# Altium PCB BUZT13-01CN-E-201-20140930.PcbDoc (part 1 of 2)
Units mm, origin at the board's own origin, x right, y up, seen from the top; angles counter-clockwise.
Board outline 64.01 x 46.1 mm, 2 copper layers (Top Layer, Bottom Layer); 112 components, 79 nets, 311 pads, 291 vias.
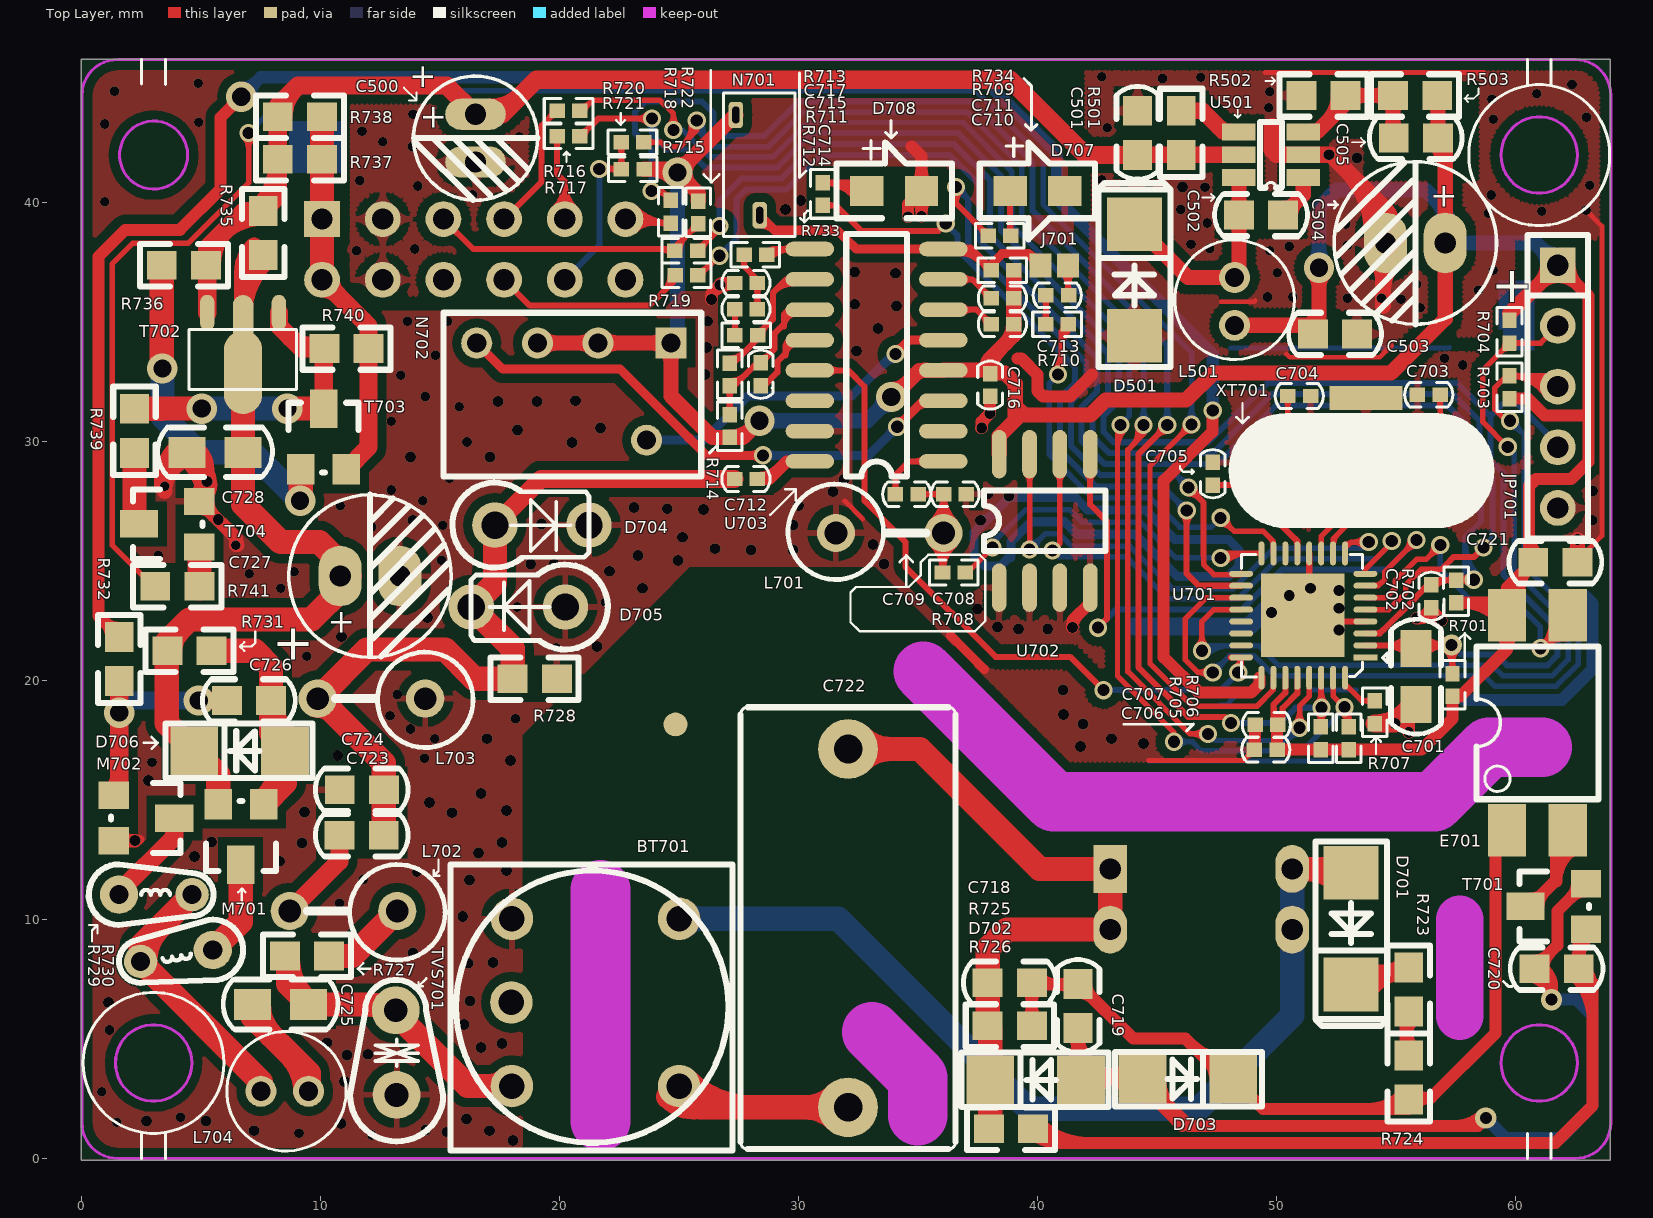
[diagram p0: Top Layer view]
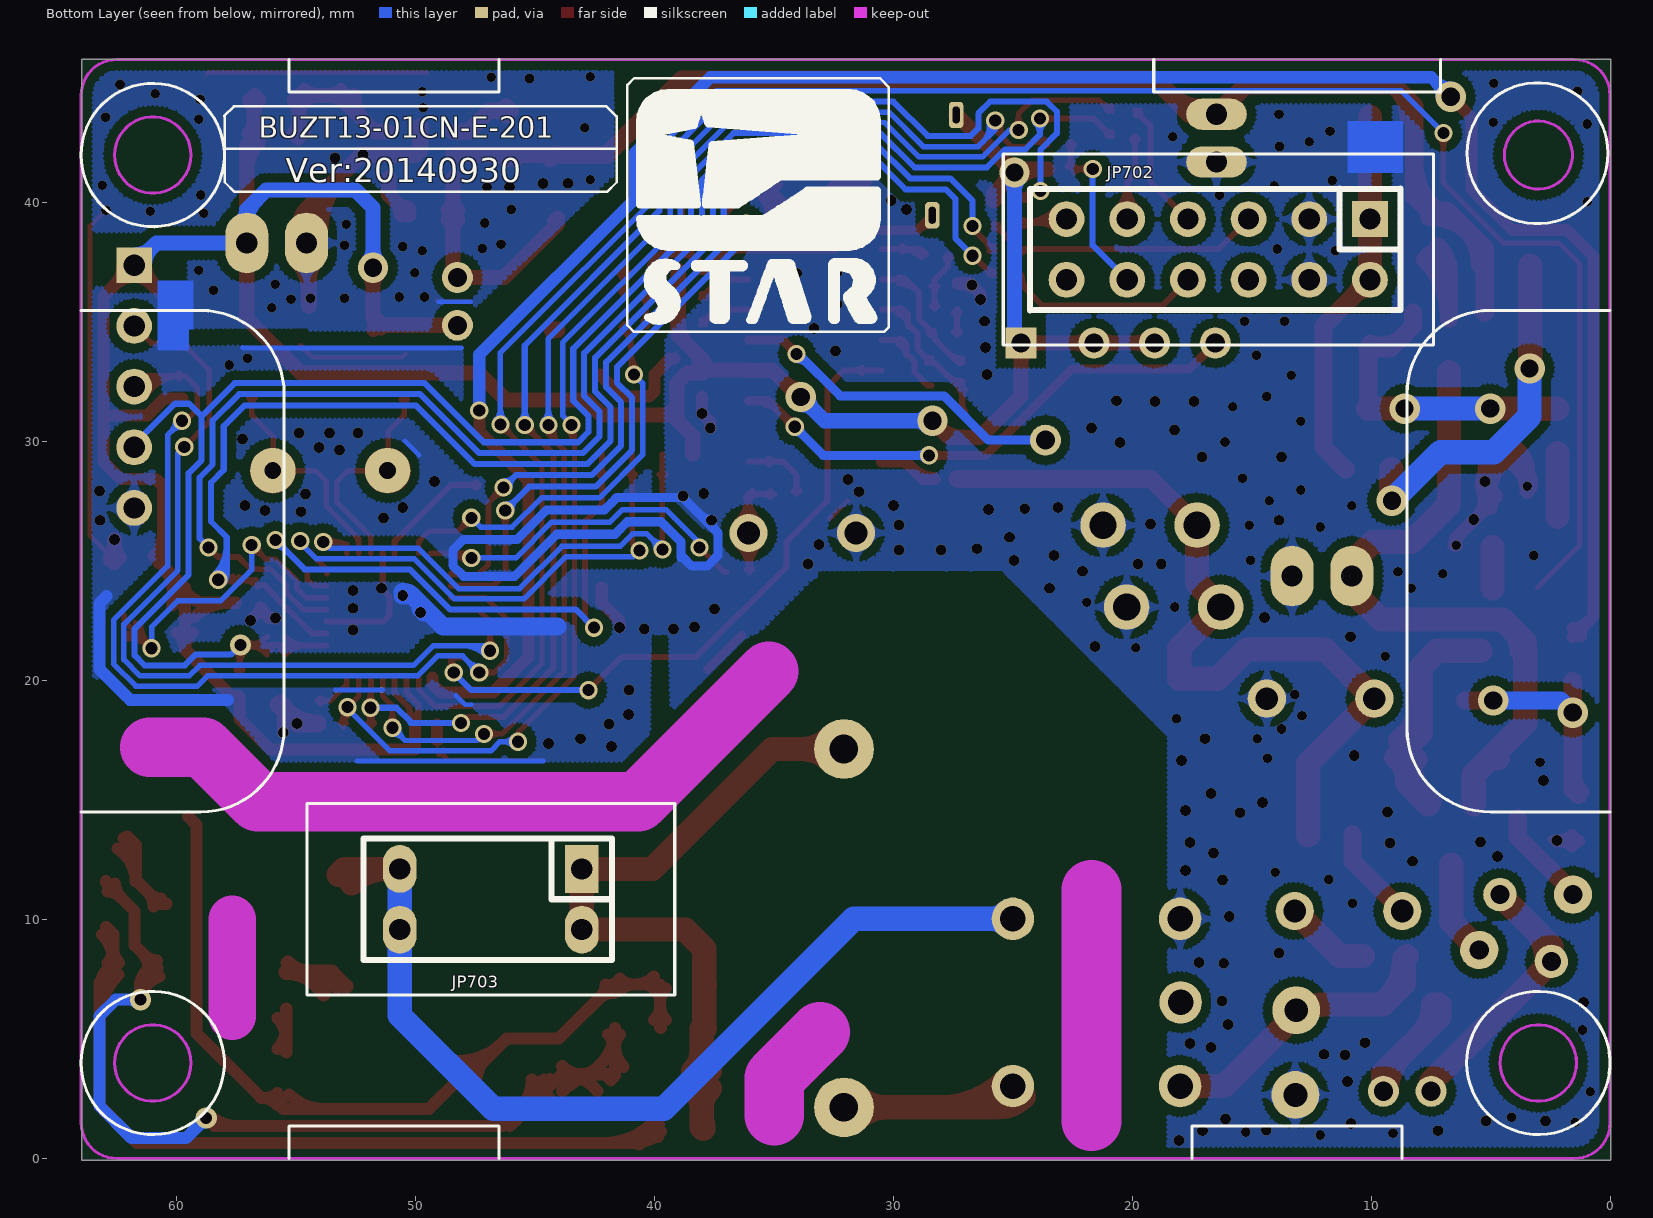
[diagram p1: Bottom Layer view, seen from below]

## Layer stack, top to bottom
Top Layer: signal copper 0.0356
Dielectric: dielectric 0.32, FR-4, Dk 4.8
Bottom Layer: signal copper 0.0356

## Board outline
-0.036,46.019 -0.036,-0.082 63.972,-0.082 63.972,4.617 63.972,46.019 -0.036,46.019

## Design rules (kind name [scope] priority, off if disabled: settings)
Clearance Clearance_2 [Inpoly] p1: gap=0.381
Clearance [All] p2: gap=0.203
Clearance JumpClearance [All vs (InComponent('J701'))] p3: gap=0.152
Clearance ArmClearance_1 [All vs (InComponent('U304'))] p4: gap=0.203
ComponentClearance [All] p1 off: gap=0.254 collisioncheckmode=3 verticalgap=0.254 showdistances=FALSE
DiffPairsRouting [All] p1: maxlimit=0.254 minlimit=0.152 mostfreqgap=0.254 maxuncoupledlength=12.7
HoleToHoleClearance [All] p1: gap=0 allowstackedmicrovias=TRUE
MinimumSolderMaskSliver [All] p1: minsoldermaskwidth=0
PolygonConnect ViaPolygonConnect [isVia] p1: connectstyle=Direct reliefconductorwidth=0.254 reliefentries=4 polygonreliefangle="90 Angle"
PolygonConnect [All] p2: connectstyle=Relief reliefconductorwidth=0.254 reliefentries=4 polygonreliefangle="90 Angle"
RoutingVias [All] p1: holewidth=0.406 width=0.406 viastyle="Through Hole" minholewidth=0.406 minwidth=0.406 maxholewidth=0.762 maxwidth=1.27
SilkToSilkClearance [All] p1: silktosilkclearance=0
SilkscreenOverComponentPads [All] p1: minsilkscreentomaskgap=0
SolderMaskExpansion [All] p1: expansion=0.102
TestPointUsage [All] p1: valid=0 allowmultiple=FALSE
Testpoint [All] p1: side=3 testpointundercomponent=TRUE minsize=1.016 maxsize=2.54 preferedsize=1.524 minholesize=0.508 maxholesize=1.016 preferedholesize=0.813 testpointgrid=0.025 style=297 order=0123456789
Width [All] p1: maxlimit=2.54 minlimit=0.102 preferedwidth=0.254
18 further rules are at their usual default settings.

## Components (designator, comment, footprint, x,y, rotation, side; value= is the part's Value field where it differs from the comment)
BT701 "A80806016(R)" OHXQ_1 25.008,3.042 r90 top
C500 "RD47uF/35V" CAP_ELE_5.0_2.0 16.474,43.707 r90 top
C501 "0603YB105K" CAP_SMD_0603 44.185,42.005 r90 top
C502 "06035G104Z" CAP_SMD_0603 50.281,39.491 r180 top
C503 "0603YB105K" CAP_SMD_0603 51.526,34.512 r0 top
C504 "WL 47uF/50V" CAP_ELE_6.3_2.5 57.063,38.322 r0 top
C505 "06035C470J" CAP_SMD_0603 56.758,42.717 r180 top
C701 "08053B106K" CAP_SMD_0805 55.844,18.993 r90 top
C702 "04025C150K" CAP_SMD_0402 56.479,23.057 r90 top
C703 "04025A200J" CAP_SMD_0402 55.897,31.97 r0 top
C704 "04025A200J" CAP_SMD_0402 51.427,31.914 r180 top
C705 "0402YB105K" CAP_SMD_0402 47.335,28.188 r90 top
C706 "04025G104Z" CAP_SMD_0402 50.027,17.113 r180 top
C707 "04025G104Z" CAP_SMD_0402 50.053,18.155 r180 top
C708 "04025C223K" CAP_SMD_0402 37.023,27.807 r180 top
C709 "04025C103K" CAP_SMD_0402 34.051,27.807 r0 top
C710 "04025G104Z" CAP_SMD_0402 39.004,34.919 r180 top
C711 "04025G104Z" CAP_SMD_0402 39.004,36.011 r180 top
C712 "04025A103K" CAP_SMD_0402 27.32,28.442 r0 top
C713 "04025A103K" CAP_SMD_0402 40.35,36.138 r0 top
C714 "04025G104Z" CAP_SMD_0402 28.412,32.353 r90 top
C715 "04025G104Z" CAP_SMD_0402 27.32,35.554 r0 top
C716 "04025G104Z" CAP_SMD_0402 38.013,31.896 r90 top
C717 "04025C332K" CAP_SMD_0402 28.27,36.646 r180 top
C718 "06035C561K" CAP_SMD_0603 37.912,7.36 r0 top
C719 "06035G224Z" CAP_SMD_0603 41.696,5.455 r90 top
C720 "06035C561K" CAP_SMD_0603 62.651,7.944 r180 top
C721 "06035G104Z" CAP_SMD_0603 60.746,24.962 r0 top
C722 "B32922C3154K189" CAP_PFC_15_18_8.5 32.07,17.139 r270 top
C723 "06035C331J" CAP_SMD_0603 10.784,13.532 r0 top
C724 "06035C332K" CAP_SMD_0603 12.639,15.437 r180 top
C725 "08055C223K" CAP_SMD_0805 9.489,6.445 r180 top
C726 "06035C333K" CAP_SMD_0603 7.914,19.171 r180 top
C727 "RD47uF/50V" CAP_ELE_6.3_2.5 10.81,24.378 r180 top
C728 "08055G105Z" CAP_SMD_0805 6.746,29.559 r180 top
D501 "SM140A" DO-214AC 44.058,34.385 r90 top
D701 "M7(DO-214AC)" DO-214AC 53.126,12.008 r270 top
D702 "LL4148" LL-34 41.823,3.296 r180 top
D703 "ZMM5V1" LL-34 44.389,3.321 r0 top
D704 "1N4679" DIODE-I 17.287,26.511 r0 top
D705 "1N4679" DIODE-I 20.233,23.082 r180 top
D706 "LL4148" LL-34 8.498,17.063 r180 top
D707 "TY-0805URC" LED_0805 38.851,40.5 r0 top locked
D708 "SB-172UYG-CT" LED_0805 32.857,40.5 r0 top locked
E701 "EL2501SK-G" OPT_SOP 59.654,13.735 r90 top
J701 "CA_PAD" CA_PAD 41.279,37.379 r180 top
JP701 "" CON_S_5 61.762,37.408 r270 top
JP702 "*" CON_D_12 10.05,39.32 r0 bottom locked
JP703 "*" CON_D_8 43.04,12.12 r0 bottom
L501 "A61130052" IND_PLU_2_5 48.249,36.875 r270 top
L701 "CECL907311" L4.0-4.5 31.562,26.181 r0 top
L702 "CECL907309" L4.0-4.5 13.197,10.357 r180 top
L703 "CECL907310" L4.0-4.5 14.366,19.247 r180 top
L704 "A61130052" IND_PLU_2_5 9.489,2.813 r180 top
M701 "WPM3407-3/TR" SOT-23-3 7.609,14.827 r180 top
M702 "WNM2306B－3/TR" SOT-23-3 1.336,15.208 r270 top
N701 "JTBM455C28" JTBM455C28 27.371,43.682 r270 top locked
N702 "LT455BW" LT4551 24.653,34.131 r270 top
R501 "0603CR104J" RES_SMD_0603 46.014,42.005 r90 top
R502 "0603CR912J" RES_SMD_0603 51.043,44.495 r0 top
R503 "0603CR473J" RES_SMD_0603 54.879,44.495 r0 top
R701 "0402CR103J" RES_SMD_0402 57.368,19.349 r90 top
R702 "0402CR103J" RES_SMD_0402 57.52,23.26 r90 top
R703 "0402CR103J" RES_SMD_0402 59.756,32.76 r270 top
R704 "0402CR103J" RES_SMD_0402 59.756,34.131 r90 top
R705 "0402CR103J" RES_SMD_0402 51.856,17.113 r90 top
R706 "0402CR103J" RES_SMD_0402 53.025,17.113 r90 top
R707 "0402CR103J" RES_SMD_0402 54.117,18.206 r90 top
R708 "0402CR153J" RES_SMD_0402 36.972,24.53 r180 top
R709 "0402CR222J" RES_SMD_0402 39.004,37.179 r180 top
R710 "0402CR222J" RES_SMD_0402 41.29,34.919 r180 top
R711 "0402CR222J" RES_SMD_0402 28.285,34.462 r180 top
R712 "0402CR105J" RES_SMD_0402 27.117,33.293 r270 top
R713 "0402CR103J" RES_SMD_0402 27.716,37.829 r0 top
R714 "0402CR103J" RES_SMD_0402 27.117,31.134 r270 top
R715 "0402CR101J" RES_SMD_0402 25.77,37.992 r180 top
R716 "0402CR101J" RES_SMD_0402 20.843,43.86 r180 top
R717 "0402CR101J" RES_SMD_0402 20.843,42.793 r180 top
R718 "0402CR101J" RES_SMD_0402 24.653,40.1 r270 top
R719 "0402CR101J" RES_SMD_0402 24.831,36.976 r0 top
R720 "0402CR101J" RES_SMD_0402 22.57,42.539 r0 top
R721 "0402CR103J" RES_SMD_0402 22.577,41.404 r0 top
R722 "0402CR103J" RES_SMD_0402 25.796,40.075 r270 top
R723 "0603CR514J" RES_SMD_0603 55.539,7.995 r270 top
R724 "0603CR514J" RES_SMD_0603 55.539,4.312 r270 top
R725 "0603CR474J" RES_SMD_0603 37.912,5.556 r0 top
R726 "0603CR473J" RES_SMD_0603 37.962,1.238 r0 top
R727 "0603CR621J" RES_SMD_0603 8.498,8.477 r0 top
R728 "0603CR222J" RES_SMD_0603 19.878,20.085 r180 top
R729 "MOF1W±5% 12Ω PT" LCEC-101L 4.612,11.043 r0 top
R730 "MOF1W±5% 12Ω PT" LCEC-101L 2.453,8.249 r189 top
R731 "0603CR222J" RES_SMD_0603 5.425,21.254 r180 top
R732 "0603CR51R0F" RES_SMD_0603 1.564,19.984 r90 top
R733 "0402CR222J" RES_SMD_0402 31.003,39.897 r90 top
R734 "0402CR222J" RES_SMD_0402 37.937,38.627 r0 top
R735 "0603CR103J" RES_SMD_0603 7.584,37.814 r90 top
R736 "0603CR510J" RES_SMD_0603 3.342,37.383 r0 top
R737 "0603CR100J" RES_SMD_0603 8.194,41.828 r0 top
R738 "0603CR100J" RES_SMD_0603 8.194,43.606 r0 top
R739 "0603CR512J" RES_SMD_0603 2.199,29.534 r90 top
R740 "0603CR102J" RES_SMD_0603 10.149,33.903 r0 top
R741 "0603CR103J" RES_SMD_0603 4.917,23.946 r180 top
T701 "2SC2412KT146R" SOT-23_BCE 62.956,9.595 r90 top
T702 "2SAR293PT100" SOT-428 8.244,35.401 r180 top
T703 "2SA1037AKT146R" SOT-23_BCE 9.159,28.848 r0 top
T704 "2SC2412KT146R" SOT-23_BCE 4.917,25.597 r90 top
TVS701 "P6KE22CA" TVS0.14L 13.172,2.661 r90 top
U501 "MP2451DT-LF-Z" "SOT-23 - 6L" 51.12,41.066 r90 top
U701 "M058ZDN" QFN-33 51.122,22.724 r180 top
U702 "CAT24C02WI-GT3" SO-8 38.394,23.895 r90 top
U703 "MC3361BPL" SOP-16 36.057,29.178 r180 top
XT701 "11.0592MHz" XTAL_PLU_HC-49US 51.173,28.795 r0 top

## Footprints (in the part's own frame and the unit in brackets; to place one, negate y for a bottom-side part, rotate by r counter-clockwise, add the part's x,y. Pads: shape width x height; smd on the part's side, far side on the other; paste and mask are expansions set on the pad)
CA_PAD [mil]
  rect 36x40 smd: 1(0.43,0.14) 2(45.43,0.14)
CAP_ELE_5.0_2.0 [mm]
  oval 1.3x2.54 hole 0.889: 1(0.002,-0.001) 2(-1.998,-0.001)
  silkscreen extent -3.6,-2.6 1.6,2.6
CAP_ELE_6.3_2.5 [mm]
  oval 1.8x2.54 hole 0.889: 1(0,0) 2(-2.5,0)
  silkscreen extent -4.65,-3.41 2.15,3.4
CAP_PFC_15_18_8.5 [mm]
  round 2.5 hole 1.2: 1(0,0) 2(15,0)
  silkscreen extent -1.75,-4.5 16.75,4.5
CAP_SMD_0402 [mm] "0402C"
  rect 0.65x0.6 smd: 1(0,0) 2(0.95,0)
  silkscreen extent -0.53,-0.52 1.48,0.52
CAP_SMD_0603 [mm]
  rect 1.25x1.2 smd: 1(0,0) 2(1.85,0)
  silkscreen extent -1.01,-0.89 2.87,0.89
CAP_SMD_0805 [mm]
  rect 1.55x1.3 smd: 1(0,0) 2(2.35,0)
  silkscreen extent -1.23,-1.05 3.58,1.04
CON_D_8 [mm]
  rect 1.4x2 hole 0.889: 1(0,0)
  oval 1.4x2 hole 0.889: 2(0,2.54) 7(7.62,0) 8(7.62,2.54)
  silkscreen extent -1.27,-1.27 9.14,3.81
CON_D_12 [mm]
  rect 1.5x1.5 hole 0.889: 1(0,0)
  round 1.5 hole 0.889: 2(0,2.54) 3(2.54,0) 4(2.54,2.54) 5(5.08,0) 6(5.08,2.54) 7(7.62,0) 8(7.62,2.54) 9(10.16,0) 10(10.16,2.54) 11(12.7,0) 12(12.7,2.54)
  silkscreen extent -1.27,-1.27 14.22,3.81
CON_S_5 [mm]
  rect 1.5x1.5 hole 0.889: 1(0.019,0.016)
  round 1.5 hole 0.889: 2(2.559,0.016) 3(5.099,0.016) 4(7.639,0.016) 5(10.179,0.016)
  silkscreen extent -1.25,-1.25 11.45,1.29
DIODE-I [mil]
  round 75 hole 45: A(0,0) K(155,0)
  silkscreen extent -70,-70 155,70
DO-214AC [mm]
  rect 2.25x2.3 smd: A(0.051,0) K(4.725,0)
  silkscreen extent -1.25,-1.5 6.45,1.5, body extent 0.06,-1.35 4.66,1.35, height 2.4
IND_PLU_2_5 [mm]
  round 1.3 hole 0.8: 1(0,0) 2(2,0)
  silkscreen extent -1.57,-2.5 3.43,2.5
JTBM455C28 [mm]
  rrect50% 1.1x0.6 hole 0.3 slot 0.7 at 0 deg: 1(0,0) 2(4.2,1)
  silkscreen extent -0.91,-0.52 5.09,2.48
L4.0-4.5 [mm]
  round 1.6 hole 0.95: 1(0,0) 2(4.5,0)
  silkscreen extent -2,-1.95 3.76,2.05
LCEC-101L [mm]
  round 1.4 hole 0.8: 1(0,0)
  round 1.6 hole 0.8: 2(-3.06,0)
  silkscreen extent -4.33,-1.27 0.9,1.27
LED_0805 [mm]
  rect 1.4x1.27 smd: A(0,0) K(2.286,0)
  silkscreen extent -1.27,-2.03 3.56,2.03
LL-34 [mm]
  rect 2x2.032 smd: A(0,0) K(3.8,0)
  silkscreen extent -1.15,-1.14 5.01,1.14
LT4551 [mm]
  rect 1.3x1.3 hole 0.8: 1(0,0)
  round 1.3 hole 0.8: 2(0,-3.048) 3(0,-5.588) 4(0,-8.128) 5(4.064,-1.016)
  silkscreen extent -1.27,-9.53 5.59,1.27
OHXQ_1 [mil]
  round 70 hole 42: 1(-0.37,0.51) 2(275.23,0.51) 3(-0.37,276.1) 4(275.23,276.1) 5(137.43,277)
  silkscreen extent -106,-87 365,378
OPT_SOP [mm]
  rect 2.2x1.6 smd: 1(0,0) 2(0,-2.54) 3(9,-2.54) 4(9,0)
  silkscreen extent 1.3,-3.82 7.7,1.28
QFN-33 [mm]
  rect 1x0.25 smd: 1(-2.6,1.75)
  oval 1x0.25 smd: 2(-2.6,1.25) 3(-2.6,0.75) 4(-2.6,0.25) 5(-2.6,-0.25) 6(-2.6,-0.75) 7(-2.6,-1.25) 8(-2.6,-1.75) 17(2.6,-1.75) 18(2.6,-1.25) 19(2.6,-0.75) 20(2.6,-0.25) 21(2.6,0.25) 22(2.6,0.75) 23(2.6,1.25) 24(2.6,1.75)
  oval 0.25x1 smd: 9(-1.75,-2.6) 10(-1.25,-2.6) 11(-0.75,-2.6) 12(-0.25,-2.6) 13(0.25,-2.6) 14(0.75,-2.6) 15(1.25,-2.6) 16(1.75,-2.6) 25(1.75,2.6) 26(1.25,2.6) 27(0.75,2.6) 28(0.25,2.6) 29(-0.25,2.6) 30(-0.75,2.6) 31(-1.25,2.6) 32(-1.75,2.6)
  rect 3.5x3.5 smd: 33(0.028,-0.014)
  silkscreen extent -3.53,-2.55 2.59,2.58
RES_SMD_0402 [mm] "0402R"
  rect 0.65x0.6 smd: 1(0,0) 2(0.95,0)
  silkscreen extent -0.54,-0.52 1.49,0.52, body extent -0.02,-0.25 0.98,0.25, height 0.35
RES_SMD_0603 [mm]
  rect 1.25x1.2 smd: 1(0,0) 2(1.85,0)
  silkscreen extent -0.92,-0.89 2.77,0.89
SO-8 [mil]
  oval 80x24 smd: 1(0,0) 2(0,-50) 3(0,-100) 4(0,-150) 5(220,-150) 6(220,-100) 7(220,-50) 8(220,0)
  silkscreen extent 60,-175 160,25
SOP-16 [mil]
  oval 80x24 smd: 1(0,0) 2(0,-50) 3(0,-100) 4(0,-150) 5(0,-200) 6(0,-250) 7(0,-300) 8(0,-350) 9(220,-350) 10(220,-300) 11(220,-250) 12(220,-200) 13(220,-150) 14(220,-100) 15(220,-50) 16(220,0)
  silkscreen extent 60,-375 160,25
"SOT-23 - 6L" [mm]
  rect 0.7x1.4 smd: 1(0,0) 2(0.95,0) 3(1.9,0) 4(1.9,2.7) 5(0.95,2.7) 6(0,2.7)
  silkscreen extent -0.43,0.89 2.31,1.8
SOT-23-3 [mil]
  rect 45x50 smd: 1(0,0) 2(75,0)
  rect 45x62.99 smd: 3(38,99.69)
  silkscreen extent -20,-5 95,110
SOT-23_BCE [mil]
  rect 45x50 smd: B(0,0) E(75,0)
  rect 45x62.99 smd: C(38,99.69)
  silkscreen extent -20,-5 95,110, body extent -19,-8 95,102, height 47
SOT-428 [mm]
  oval 0.6x1.5 smd: B(0,0) E(3,0)
  oval 1.6x3.5 smd: C(1.499,2.489)
  oval 0.864x2 smd: C(1.5,0.254)
  silkscreen extent -0.74,0.71 3.76,3.21
TVS0.14L [mm]
  round 2 hole 1: 1(0,0) 2(3.542,0.037)
  silkscreen extent -1.95,-1.95 4.81,1.95
XTAL_PLU_HC-49US [mm]
  round 0.7 / inner round 0.7 / far side round 1.905 hole 0.7: 1(0,0) 2(4.8,0)
  rect 3.048x1.016 smd: 3(2.57,3.036)
  Top Layer lines w1.905: -0.025,0 0,0 ; 4.775,0 4.8,0
  silkscreen extent -3.05,-2.29 7.82,2.29

## Part data
BT701: library part 2115RKPL0101
C500: library part 203204705102
C501 C503: library part 203031052501
C502 C721: library part 203031044302
C504: library part YZ0100000213
C505: library part 203034704201
C701: library part 203021063501
C702 C703 C704 C705 C706 C707 C708 C709 C710 C711 C712 C713 C714 C715 C716 C717: library part CAP_NOP
C718 C720: library part 203035614201
C719: library part 203032244302
C722: library part 203315430401
C723: library part YZ0100000211
C724: library part 203033324201
C725: library part 203022234202
C726: library part 203033334201
C727: library part 203204706201
C728: library part 203021054302
D501: library part DIO
D701: library part 205101012001
D702 D706: library part 205205012002
D703: library part 205000003201
D704 D705: library part DIO_ZEN
D707: library part 210017100203
D708: library part 210017G00301
E701: library part 210402012002
J701: library part 291000000001, "WithOutBom"
JP701: library part 230105140001
JP702: library part 230212104005
JP703: library part 230308104002
L501 L704: library part 211110012002
L701 L702 L703: library part IND
M701: library part 208105022001
M702: library part 208105012001
N701: library part 207202011001
N702: library part 207202011002
R501: library part 201031003301
R502: library part 201039101001
R503 R726: library part 201034702301
R701 R702 R703 R704 R705 R706 R707 R708 R709 R710 R711 R712 R713 R714 R715 R716 R717 R718 R719 R720 R721 R722 R729 R730 R733 R734: library part RES
R723 R724: library part 201035103301
R725: library part 201034703301
R727: library part 201036200301
R728 R731: library part 201032201301
R732: library part 201030510101
R735 R741: library part 201031002301
R736: library part 201030510301
R737 R738: library part 201030100301
R739: library part 201035101301
R740: library part 201031001301
T701 T704: library part 208011012003
T702: library part 208010012003
T703: library part 208010012004
TVS701: library part TVS_BID
U501: library part 215413011001
U701: library part 217820013101
U702: library part 217020002201
U703: library part 217405012001
XT701: library part 207011M03402

## Free pads (board coordinates)
  round 1 smd: ""(24.846,18.17)

## Via types
v1: diameter 0.457, hole 0.457, Top Layer to Bottom Layer, 135 vias
v2: diameter 0.406, hole 0.406, Top Layer to Bottom Layer, 96 vias
v3: diameter 0.762, hole 0.508, Top Layer to Bottom Layer, 46 vias
v4: diameter 1.27, hole 0.762, Top Layer to Bottom Layer, 11 vias
v5: diameter 0.889, hole 0.508, Top Layer to Bottom Layer, 3 vias

## Nets (pads, with @x,y where several pads share a name; then routed paths per layer and width w, separated by ;. In a path a pad name is that pad's centre, name@x,y a point inside that pad or via, vN(x,y) a via of type N, cw(c..) or ccw(c..) an arc to the next point about the centre after c; other vN are vias at no path point)
185KHZ: R708.1 U701.16 | length 15.6
  Top Layer w0.229: R708.1@36.972,24.53 37.073,24.53 v3(38.115,25.572) ; v3@47.692,25.113 cw(c48.202,24.603) 48.202,25.324 ; v3@47.85,25.324 U701.16@49.372,25.324 ; v3@47.854,24.951 cw(c48.754,24.051) 48.754,25.324
  Bottom Layer w0.229: v3@38.115,25.76 39.514,27.159 41.34,27.159 41.423,27.076 41.86,26.639 44.301,26.639 45.799,25.14 v3(47.665,25.14)
+5V: C503.1 C504.1 C505.1 C706.1 C707.1 C710.1 C711.1 C716.2 C721.1 E701.4 JP701.1 L501.2 N701.1 N702.1 N702.2 N702.3 R503.2 R701.1 R702.1 R703.2 R704.2 R705.1 R706.1 R709.1 R714.2 R721.2 R722.1 U701.27 U701.28 U702.8 U703.4 | length 188.3
  Top Layer w0.254: 49.875,18.941 ccw(c50.814,18.941) C707.1@50.15,18.277 ; C707.1@49.88,18.328 49.875,18.333 49.875,18.993 50.372,19.49 U701.27@50.372,20.124 ; C707.1@49.974,18.293 ccw(c49.552,18.857) 50.256,18.857 ; C707.1@50.053,18.155 50.256,18.358 50.256,18.857 ; U701.28@50.872,20.124 50.872,19.473 50.256,18.857 ; E701.4@59.603,22.684 E701.4@59.654,22.634
  Top Layer w0.508: 39.067,31.795 ccw(c39.842,31.896) 39.944,31.122 ; C707.1@50.027,18.19 C706.1@50.027,17.113 R705.1@51.856,17.113 R706.1@53.025,17.113 56.073,17.113 57.368,18.409 R701.1@57.368,19.349 57.698,19.349 59.654,21.304 ; R702.1@57.52,23.26 E701.4@59.027,23.26 ; R702.1@57.793,23.26 cw(c57.793,21.174) E701.4@59.268,22.649 ; E701.4@58.879,23.26 ccw(c58.879,23.81) E701.4@59.268,23.421 ; E701.4@59.314,22.008 cw(c58.756,21.305) 59.654,21.305 ; E701.4@59.422,23.529 ccw(c59.25,23.895) 59.654,23.895 ; E701.4@59.654,22.481 E701.4@59.654,22.608 ; E701.4@59.667,22.621 E701.4@59.654,22.608 ; E701.4@59.691,23.043 cw(c61.032,23.333) 60.062,24.303 ; R703.2@59.756,31.81 60.519,31.81 61.227,31.102 62.927,31.102 63.061,31.236 ; E701.4@59.886,23.529 cw(c60.058,23.895) 59.654,23.895 ; E701.4@59.994,22.008 ccw(c60.552,21.305) 59.654,21.305 ; E701.4@60.188,23.151 cw(c62.115,23.567) C721.1@60.721,24.962 ; 60.571,26.161 ccw(c61.92,26.161) C721.1@60.966,25.207 ; C721.1@60.746,24.937 C721.1@60.734,24.949 ; JP701.1@61.778,36.893 cw(c61.778,35.695) 62.625,36.542 cw(c63.471,37.389) JP701.1@62.274,37.389 ; JP701.1@61.778,37.389 63.061,36.105 63.061,31.236 ; 59.654,21.304 E701.4@59.654,22.608 ; E701.4@59.654,22.608 59.654,22.634 E701.4@59.654,22.735 59.654,22.905 59.654,23.895 ; 59.654,23.895 C721.1@60.721,24.962 ; C721.1@60.721,24.962 C721.1@60.734,24.949 ; C721.1@60.721,24.962 C721.1@60.746,24.962 C721.1@60.734,24.949 ; C721.1@60.721,24.962 60.571,25.112 60.571,28.15 60.863,28.442 62.336,28.442 63.058,29.164 63.058,30.781 63.061,30.785 63.061,31.236
  Top Layer w0.635: N702.3@19.065,34.131 N702.2@21.605,34.131 N702.1@24.653,34.131 24.653,32.988 ; N702.3@19.3,33.896 cw(c19.868,33.329) 19.868,34.131 cw(c19.868,34.934) N702.3@19.3,34.367 ; N702.2@21.37,33.896 ccw(c20.802,33.329) 20.802,34.131 ccw(c20.802,34.934) N702.2@21.37,34.367 ; N702.2@21.84,33.896 cw(c22.408,33.329) 22.408,34.131 cw(c22.408,34.934) N702.2@21.84,34.367 ; R721.2@23.527,41.404 24.645,41.404 v4@24.721,41.48 ; R721.2@23.84,41.404 cw(c23.84,40.177) v4@24.708,41.044 ; N702.1@24.418,34.367 cw(c23.85,34.934) 23.85,34.131 cw(c23.85,33.329) 24.418,33.896 cw(c23.85,33.329) 24.653,33.329 cw(c25.456,33.329) N702.1@24.888,33.896 ; 24.653,32.623 24.653,32.988 ; v4@24.932,40.951 cw(c24.932,40.185) 25.474,40.727 cw(c26.016,41.269) 25.25,41.269 cw(c26.016,41.269) 25.474,41.811 cw(c24.932,42.353) v4@24.932,41.586 ; R722.1@25.796,40.075 25.796,40.405 v4(24.932,41.269) 27.345,43.682 N701.1@27.371,43.682 ; R714.2@27.117,30.192 ccw(c27.117,31.534) v4@28.066,30.585 ; v4(28.361,30.88) 27.665,30.184 R714.2@27.117,30.184 26.39,30.184 24.653,31.922 24.653,32.988 ; v4(33.873,31.871) 33.929,31.871 35.047,32.988 U703.4@36.057,32.988 36.068,32.999 C716.2@38.013,32.999 ; v4@33.873,32.188 ccw(c33.873,33.09) 34.511,32.452 ; v4@34.191,31.871 cw(c34.822,31.871) 34.375,32.317 ; 34.856,32.798 cw(c35.346,32.309) U703.4@35.346,33.001 ; C716.2@37.996,32.871 cw(c39.402,32.871) 38.407,33.865 ; C716.2@38,32.859 cw(c38.326,33.159) 38.013,33.471 ; C716.2@38.013,32.874 38.635,32.874 39.067,32.441 39.067,30.918 ; C716.2@38.293,32.999 C716.2@38.013,32.999 ; U702.8@38.394,29.483 38.394,30.245 39.067,30.918 ; 38.668,34.126 ccw(c37.874,34.919) C710.1@38.996,34.919 ; C710.1@39.004,34.919 39.004,34.462 38.013,33.471 ; 39.004,36.646 C711.1@39.004,36.011 ; R709.1@39.004,37.162 C711.1@39.004,36.011 ; C710.1@39.029,34.919 39.004,34.944 C711.1@39.004,36.011 ; L501.2@48.249,34.875 51.367,34.875 51.78,35.288 ; C503.1@51.44,34.772 ccw(c51.219,35.288) 51.78,35.288 ; v4@51.556,37.057 cw(c51.014,36.515) 51.78,36.515 cw(c52.547,36.515) v4@52.005,37.057 ; C503.1@51.762,34.7 cw(c52.083,34.984) 51.78,35.288 ; v4(51.78,37.281) 51.78,35.288 ; R503.2@56.554,44.295 cw(c56.061,43.802) 56.758,43.802 ; C505.1@56.559,42.916 ccw(c56.076,43.399) 56.758,43.399 ccw(c57.44,43.399) C505.1@56.958,42.916 ; C505.1@56.584,42.517 cw(c55.426,41.359) 57.063,41.359 ; R503.2@56.729,44.495 56.758,44.465 C505.1@56.758,42.717 57.063,42.412 C504.1@57.063,38.322 57.063,35.147 54.8,32.884 47.357,32.884 46.217,31.744 42.839,31.744 42.217,31.122 39.271,31.122 39.067,30.918 ; 56.758,43.824 cw(c57.425,43.824) R503.2@56.954,44.295 ; R704.2@59.756,35.367 JP701.1@61.778,37.389 ; JP701.1@61.345,37.389 cw(c60.301,37.389) 61.04,36.651 cw(c61.778,35.912) JP701.1@61.778,36.956 ; C716.2@38.013,32.999 38.013,33.471
  Bottom Layer w0.635: N702.1@24.653,34.131 24.932,34.411 v4(24.932,41.269) ; v4@24.708,41.044 cw(c24.166,40.502) 24.932,40.502 cw(c25.699,40.502) v4@25.157,41.044 ; v4(28.361,30.88) 32.882,30.88 v4(33.873,31.871) ; v4@28.586,30.656 cw(c29.128,30.114) 29.128,30.88 cw(c29.128,31.647) v4@28.586,31.105 ; v4@33.556,31.871 cw(c32.789,31.871) 33.331,31.329 cw(c33.873,30.787) v4@33.873,31.553 ; v4@51.556,37.506 ccw(c51.014,38.048) 51.78,38.048 ccw(c52.547,38.048) v4@52.005,37.506 ; v4(51.78,37.281) 51.78,39.796 52.517,40.532 53.939,40.532 ; 52.872,40.532 53.939,40.532 ; 55.209,40.532 54.879,40.532 ; 56.63,40.153 cw(c55.413,38.936) C504.1@57.115,38.685 ; C504.1@56.764,39.192 ccw(c56.449,39.719) 57.063,39.719 ; C504.1@57.362,39.192 cw(c57.677,39.719) 57.063,39.719 ; JP701.1@61.345,37.389 ccw(c60.301,37.389) 61.04,38.127 ccw(c61.778,38.866) JP701.1@61.778,37.821 ; JP701.1@61.778,37.389 60.844,38.322 C504.1@57.063,38.322 57.063,39.719 ; 53.939,40.532 54.879,40.532 ; 54.879,40.532 56.25,40.532 57.063,39.719
+12V: JP702.1 JP702.2 R737.2 R738.2 R740.2 T703.E | length 17.4
  Top Layer w0.762: JP702.2@10.05,36.411 cw(c10.05,35.481) 10.708,36.139 ; JP702.2@10.05,36.78 10.066,36.78 11.771,35.075 11.999,34.847 R740.2@11.999,33.903 11.999,29.784 T703.E@11.064,28.848 ; JP702.2@10.419,36.78 ccw(c11.271,36.78) 10.668,36.178
  Top Layer w1.016: R738.2@10.044,43.606 R737.2@10.044,41.828 10.05,41.821 JP702.1@10.05,39.32 JP702.2@10.05,36.78 JP702.2@10.073,36.757
/RST: JP702.9 R717.2 | length 8
  Top Layer w0.254: JP702.9@19.769,39.761 ccw(c18.706,40.824) 20.21,40.824 ccw(c21.714,40.824) JP702.9@20.651,39.761 ; R717.2@19.77,42.671 cw(c19.475,42.375) 19.893,42.375 cw(c20.31,42.375) R717.2@20.015,42.671 ; R717.2@19.893,42.793 19.893,41.205 20.21,40.888 JP702.9@20.21,39.32 ; JP702.9@19.949,39.581 ccw(c19.319,40.211) 20.21,40.211 ccw(c21.101,40.211) JP702.9@20.471,39.581
/SET: JP702.7 R716.2 | length 6.7
  Top Layer w0.254: JP702.7@17.67,39.581 JP702.7@17.67,39.32 ; JP702.7@17.948,39.32 JP702.7@17.67,39.32 ; R716.2@19.572,43.564 cw(c19.868,43.269) R716.2@19.868,43.687 ; R716.2@19.573,43.565 ccw(c19.278,43.86) R716.2@19.695,43.86 ; R716.2@19.893,43.86 19.868,43.86 19.238,43.23 19.238,40.888 JP702.7@17.67,39.32
DCE_RXD: JP702.5 R715.2 R722.2 | length 14.2
  Top Layer w0.254: JP702.5@15.13,39.32 16.382,38.068 24.414,38.068 ; 24.194,38.068 cw(c24.194,37.391) R715.2@24.673,37.87 ; R715.2@25.018,37.992 cw(c25.876,37.992) 25.27,38.599 ; 25.458,38.787 cw(c25.796,38.449) R722.2@25.796,38.927 ; R722.2@25.518,38.847 ccw(c25.266,39.1) R722.2@25.623,39.1 ; R722.2@25.75,39.125 R722.2@25.796,39.125 ; R722.2@25.796,39.008 R722.2@25.796,39.125 ; 24.414,38.068 cw(c24.414,37.825) 24.637,37.923 ccw(c24.414,37.825) 24.414,38.068 ; 24.414,38.068 24.739,38.068 R722.2@25.796,39.125
DCE_TXD: JP702.8 R719.1 | length 8.7
  Top Layer w0.254: JP702.8@17.67,36.78 18.75,35.7 23.757,35.7 24.729,36.671 ; 24.349,36.291 ccw(c23.664,36.976) R719.1@24.633,36.976
EVENTOUT: JP702.11 R718.2 | length 6.1
  Top Layer w0.254: JP702.11@22.75,39.336 JP702.11@22.75,39.32 22.92,39.15 R718.2@24.653,39.15 cw(c24.653,41.208) JP702.11@23.192,39.759 ; JP702.11@23.012,39.58 ccw(c24.043,40.603) 24.043,39.15 ; JP702.11@23.191,38.879 cw(c23.845,38.225) 23.845,39.15 ; R718.2@24.53,39.028 ccw(c24.235,38.733) 24.235,39.15 ccw(c24.235,39.568) R718.2@24.53,39.273
EVEVTIN: R705.2 R718.1 U701.30 | length 64.8
  Top Layer w0.254: 24.315,40.438 ccw(c24.653,40.776) R718.1@24.653,40.298 ; R718.1@24.375,40.378 cw(c24.123,40.125) R718.1@24.48,40.125 ; R718.1@24.479,40.274 ccw(c23.919,39.713) v3(23.84,40.502) 24.251,40.502 R718.1@24.653,40.1 R718.1@24.722,40.1 ; 44.986,30.243 ccw(c44.526,30.702) v3@45.176,30.702 ; 45.022,30.28 cw(c45.43,29.872) v3@45.43,30.448 ; v3@45.43,30.687 44.224,29.481 44.224,20.566 46.305,18.485 47.843,18.485 v3(48.097,18.231) ; v3@51.702,18.686 cw(c51.291,18.276) R705.2@51.872,18.276 ; v3@51.702,19.046 ccw(c51.291,19.457) 51.872,19.457 ; R705.2@51.734,18.211 ccw(c51.4,18.545) v3@51.872,18.545 ; R705.2@51.856,18.063 51.872,18.079 v3@51.872,18.764 ; R705.2@51.872,18.23 cw(c52.518,18.23) v3@52.061,18.686 ; 51.872,18.468 ccw(c52.235,18.468) R705.2@51.979,18.211 ; v3@51.872,18.866 U701.30@51.872,20.124 ; 51.872,19.502 ccw(c52.518,19.502) v3@52.061,19.046
  Bottom Layer w0.254: v3(23.84,40.502) 23.84,42.223 23.154,42.908 23.154,43.824 23.571,44.241 24.16,44.241 24.164,44.237 25.956,44.237 26.444,43.748 26.444,43.117 26.759,42.802 28.564,42.802 30.003,44.241 37.237,44.241 39.791,41.687 39.791,39.669 45.43,34.03 v3(45.43,30.702) ; v3@45.25,30.882 ccw(c44.817,31.316) 45.43,31.316 ccw(c46.043,31.316) v3@45.61,30.882 ; v3(48.097,18.231) 50.205,18.231 50.205,18.272 50.8,18.866 v3(51.882,18.866)
FSK: C712.1 C723.2 C724.1 D704.A D705.K L703.2 R728.2 | length 35.4
  Top Layer w0.762: D704.A@17.287,26.511 19.217,28.442 C712.1@27.32,28.442
  Top Layer w1.016: L703.2@9.866,18.955 cw(c9.866,18.066) 10.494,18.695 ; L703.2@9.866,19.247 11.923,21.304 14.086,21.304 15.204,21.304 16.423,20.085 R728.2@18.028,20.085 18.028,21.351 D705.K@16.296,23.082 17.287,24.073 D704.A@17.287,26.511 ; L703.2@9.942,19.247 12.639,16.55 C724.1@12.639,15.437 12.634,15.433 C723.2@12.634,13.532
ICE_CLK: JP701.3 R703.1 U701.19 | length 47.8
  Top Layer w0.229: v3@47.139,20.158 ccw(c46.724,19.774) 46.724,20.339 ; v3@47.139,20.521 cw(c46.724,20.905) 46.724,20.339 ; v3(47.335,20.339) 46.724,20.339 ; U701.19@48.522,23.474 47.066,23.474 46.179,22.587 46.179,20.884 46.724,20.339 ; v3@59.611,30.88 59.138,31.353 59.138,32.266 59.632,32.76 R703.1@59.756,32.76 ; R703.1@59.887,32.629 cw(c60.204,32.312) 60.204,32.76 cw(c60.204,33.208) R703.1@59.887,32.891 ; 60.181,32.76 cw(c60.181,31.252) JP701.3@61.438,32.084 ; 60.607,32.76 cw(c60.607,31.534) JP701.3@61.629,32.21 ; 61.032,32.76 cw(c61.032,31.815) JP701.3@61.82,32.337 ; JP701.3@61.248,31.958 ccw(c59.756,30.971) R703.1@59.756,32.76 ; JP701.3@61.778,31.861 JP701.3@61.778,32.309 61.327,32.76 R703.1@59.756,32.76
  Bottom Layer w0.229: v3(47.335,20.339) 48.034,21.038 49.074,21.038 49.899,20.212 58.69,20.212 59.135,19.768 61.709,19.768 62.638,20.698 62.638,22.531 60.378,24.792 60.378,30.283 v3(59.781,30.88) ; v3@47.335,20.606 ccw(c47.335,21.25) 47.79,20.795 ccw(c48.246,20.339) v3@47.602,20.339 ; v3@59.781,30.614 cw(c59.781,29.97) 60.236,30.425 cw(c60.692,30.88) v3@60.048,30.88
ICE_DAT: JP701.2 R704.1 U701.20 | length 41
  Top Layer w0.229: v3@46.689,21.442 ccw(c46.234,21.898) 46.878,21.898 ccw(c47.522,21.898) v3@47.066,21.442 ; v3(46.878,21.254) 46.878,22.473 47.379,22.974 U701.20@48.522,22.974 ; 59.396,33.772 cw(c59.756,33.412) R704.1@59.756,33.921 ; R704.1@59.456,33.832 ccw(c59.182,34.106) R704.1@59.57,34.106 ; v3(59.679,29.788) 58.638,30.829 58.638,33.014 R704.1@59.756,34.131 61.061,34.131 JP701.2@61.778,34.849 ; R704.1@59.887,34 cw(c60.204,33.683) 60.204,34.131 cw(c60.204,34.58) R704.1@59.887,34.263
  Bottom Layer w0.229: v3(46.878,21.254) 47.094,21.47 49.253,21.47 50.078,20.644 59.032,20.644 59.476,20.2 61.53,20.2 62.207,20.877 62.207,22.352 59.946,24.613 59.946,29.521 v3(59.679,29.788) ; v3@46.905,21.227 cw(c47.491,20.64) 47.491,21.47 ; v3@47.066,21.065 cw(c48.043,20.089) 48.043,21.47
L: C718.1 C722.1 D702.K JP703.1 JP703.2 R725.1 R726.1 | length 36.6
  Top Layer w1.016: C722.1@32.095,17.164 C722.1@32.07,17.139 35.067,17.139 40.086,12.12 JP703.1@43.04,12.12 JP703.2@43.04,9.58 40.706,9.58 ; C722.1@32.594,16.614 cw(c33.861,15.348) 33.861,17.139 cw(c33.861,18.93) C722.1@32.594,17.664 ; D702.K@37.675,2.932 cw(c36.835,2.092) 38.023,2.092 cw(c39.211,2.092) D702.K@38.371,2.932 ; D702.K@37.675,3.66 ccw(c36.835,4.5) 38.023,4.5 ccw(c39.211,4.5) D702.K@38.371,3.66 ; R725.1@37.886,5.455 37.912,5.48 R725.1@37.912,5.556 ; C718.1@37.886,7.258 C718.1@37.912,7.284 ; D702.K@37.912,3.636 D702.K@38.023,3.524 ; R726.1@37.962,1.238 38.023,1.299 D702.K@38.023,3.296 D702.K@38.023,3.524 ; R726.1@37.962,1.416 R726.1@38.023,1.477 ; D702.K@37.962,3.296 37.962,3.464 D702.K@38.023,3.524 ; 40.005,9.58 40.706,9.58 ; R725.1@37.912,5.556 C718.1@37.912,7.284 ; R725.1@37.912,5.556 38.023,5.445 D702.K@38.023,3.524 ; C718.1@37.912,7.284 C718.1@37.912,7.36 37.912,8.782 38.709,9.58 40.706,9.58
M\R\S\T\: C701.2 JP701.4 R701.2 R717.1 U701.2 | length 87.9
  Top Layer w0.254: R717.1@20.843,42.793 20.868,42.793 21.605,43.529 v3(23.865,43.529) ; R717.1@20.868,42.966 ccw(c20.868,43.384) R717.1@21.163,43.088 ; R717.1@21.041,42.793 cw(c21.458,42.793) R717.1@21.163,43.088 ; v3@23.686,43.35 ccw(c23.252,42.916) 23.252,43.529 ccw(c23.252,44.143) v3@23.686,43.709 ; U701.2@53.722,21.474 55.721,21.474 55.742,21.495 55.844,21.495 v5(57.33,21.495) ; 54.566,21.474 cw(c54.566,20.19) C701.2@55.474,21.098 ; 54.596,21.474 ccw(c54.596,22.716) C701.2@55.474,21.838 ; 55.18,21.474 cw(c55.18,20.804) C701.2@55.654,21.278 ; C701.2@56.034,21.278 cw(c56.56,20.753) 56.56,21.495 ; C701.2@56.214,21.098 cw(c57.173,20.139) v5@57.173,21.495 ; C701.2@56.214,21.838 ccw(c57.041,22.665) v5@57.041,21.495 ; v5@57.106,21.72 cw(c56.564,22.262) 56.564,21.495 cw(c56.564,20.729) 57.106,21.271 cw(c56.473,20.638) 57.368,20.638 ; R701.2@57.246,20.446 ccw(c56.95,20.741) 57.368,20.741 ccw(c57.786,20.741) R701.2@57.49,20.446 ; v5@57.343,21.508 v5(57.33,21.495) ; R701.2@57.368,20.299 57.368,21.458 v5(57.33,21.495) ; 57.368,20.82 cw(c58.006,20.82) v5@57.555,21.271 ; JP701.4@61.778,29.692 JP701.4@61.778,29.769
  Bottom Layer w0.254: v3@23.686,43.35 cw(c23.252,42.916) 23.865,42.916 cw(c24.479,42.916) v3@24.045,43.35 ; v3(23.865,43.529) 23.865,42.844 24.475,42.234 25.332,42.234 26.085,41.481 29.112,41.481 30.551,42.92 36.69,42.92 38.47,41.14 38.47,38.837 39.477,37.83 ; 39.159,38.148 39.477,37.83 ; 40.211,37.083 43.398,33.896 43.398,31.718 42.763,31.084 ; 40.211,37.096 39.477,37.83 ; 42.956,31.276 42.763,31.084 ; v5(57.33,21.495) 57.737,21.089 59.216,21.089 59.66,20.644 61.346,20.644 61.762,21.061 61.762,22.168 59.502,24.429 59.502,28.683 58.956,29.229 58.956,31.071 ; JP701.4@61.778,29.769 61.778,29.889 60.076,31.591 59.476,31.591 58.956,31.071 ; 42.763,31.084 42.763,30.408 43.098,30.073 43.192,29.979 47.145,29.979 49.62,32.454 57.572,32.454 58.956,31.071
N: BT701.2 D701.A JP703.7 JP703.8 | length 42.5
  Top Layer w1.016: JP703.7@50.777,12.237 JP703.7@50.66,12.12 52.989,12.12 D701.A@53.228,11.881 ; JP703.7@51.219,12.12 cw(c51.219,10.075) D701.A@52.665,11.521
  Bottom Layer w1.016: BT701.2@25.122,10.033 31.657,10.033 39.613,2.077 46.751,2.077 50.66,5.986 JP703.8@50.66,9.58 JP703.7@50.66,12.12 ; BT701.2@25.265,9.763 cw(c25.915,9.113) 25.915,10.033 cw(c25.915,10.952) BT701.2@25.265,10.302
NetBT701_1: BT701.1 C722.2 | length 15
  Top Layer w1.016: BT701.1@24.546,2.584 ccw(c25.62,3.657) 25.62,2.139 ; BT701.1@25.122,3.033 BT701.1@24.995,3.033 25.889,2.139 C722.2@32.07,2.139 ; BT701.1@25.265,3.302 ccw(c28.073,6.11) 28.073,2.139 ; C722.2@31.545,1.614 ccw(c30.278,0.348) 30.278,2.139 ccw(c30.278,3.93) C722.2@31.545,2.664 ; C722.2@32.044,2.291 32.171,2.164 C722.2@32.07,2.164
NetBT701_3: BT701.3 C725.1 R727.1 TVS701.2 | length 16
  Top Layer w1.016: R727.1@8.498,8.477 R727.1@8.625,8.351 ; C725.1@9.456,6.554 cw(c10.984,8.351) R727.1@8.625,8.351 ; 12.132,6.426 12.912,6.426 TVS701.2@13.135,6.203 13.135,6.051 16.153,3.033 BT701.3@17.995,3.033 ; 12.132,6.445 C725.1@9.489,6.445 8.625,7.309 R727.1@8.625,8.351 ; BT701.3@17.726,2.763 ccw(c17.076,2.113) 17.076,3.033 ccw(c17.076,3.952) BT701.3@17.726,3.302 ; BT701.3@18.059,3.096 BT701.3@18.122,3.033
NetC502_1: C502.1 U501.1 | length 3
  Top Layer w0.635: C502.1@50.281,39.491 51.12,40.329 U501.1@51.12,41.066 ; C502.1@50.306,39.773 ccw(c50.306,40.395) C502.1@50.746,39.955 ; C502.1@50.589,39.491 cw(c51.331,39.491) C502.1@50.806,40.016
NetC502_2: C502.2 D501.K L501.1 U501.6 | length 11.9
  Top Layer w0.635: D501.K@44.058,39.11 46.294,36.875 L501.1@48.249,36.875 L501.1@48.431,37.057 ; D501.K@44.058,39.364 D501.K@44.185,39.237 ; C502.2@48.232,39.291 cw(c47.749,38.809) 48.431,38.809 cw(c49.113,38.809) C502.2@48.631,39.291 ; C502.2@48.232,39.691 ccw(c47.749,40.173) 48.431,40.173 ccw(c49.113,40.173) C502.2@48.631,39.691 ; L501.1@48.249,37.057 L501.1@48.431,37.057 ; U501.6@48.42,41.066 48.431,41.054 C502.2@48.431,39.491 L501.1@48.431,37.057
NetC505_2: C505.2 R502.2 R503.1 U501.3 | length 12.6
  Top Layer w0.635: U501.3@51.343,42.966 U501.3@51.12,42.966 51.699,42.966 52.893,44.16 R502.2@52.893,44.495 R503.1@54.879,44.495 54.879,42.746 C505.2@54.908,42.717 ; U501.3@51.47,42.998 ccw(c51.47,43.63) 51.916,43.183 ; 52.132,43.399 ccw(c51.036,44.495) R502.2@52.586,44.495 ; R502.2@53.118,44.295 cw(c53.6,43.813) 53.6,44.495 cw(c53.6,45.177) R502.2@53.118,44.694 ; R503.1@54.654,44.295 ccw(c54.172,43.813) 54.172,44.495 ccw(c54.172,45.177) R503.1@54.654,44.694 ; R503.1@54.679,44.295 cw(c54.197,43.813) 54.879,43.813 cw(c55.561,43.813) R503.1@55.079,44.295 ; C505.2@54.684,42.916 ccw(c54.213,43.388) 54.879,43.388 ; 54.879,43.41 ccw(c55.577,43.41) C505.2@55.083,42.916
NetC703_2: C703.2 U701.10 XT701.2 | length 12.5
  Top Layer w0.229: U701.10@52.372,25.324 52.372,25.934 53.736,27.298 53.736,28.34 54.19,28.795 55.948,28.795 55.948,30.196 56.847,31.096 C703.2@56.847,31.97 ; U701.10@52.383,25.699 cw(c52.976,25.699) 52.557,26.119 ; XT701.2@55.806,28.628 ccw(c55.404,28.226) 55.404,28.795 ccw(c55.404,29.364) 55.806,28.962 ccw(c55.465,29.303) 55.948,29.303 ; 55.948,29.425 ccw(c56.603,29.425) XT701.2@56.14,28.962 ; C703.2@56.716,31.839 cw(c56.399,31.522) 56.847,31.522 cw(c57.296,31.522) C703.2@56.979,31.839
NetC704_2: C704.2 U701.11 XT701.1 | length 11.8
  Top Layer w0.229: C704.2@50.346,31.783 cw(c50.029,31.466) 50.477,31.466 cw(c50.925,31.466) C704.2@50.608,31.783 ; C704.2@50.477,31.914 50.477,31.091 51.148,30.42 51.148,28.795 XT701.1@51.173,28.795 52.824,28.795 53.304,28.315 53.304,27.477 51.872,26.045 U701.11@51.872,25.324 ; XT701.1@51.006,28.962 ccw(c50.665,29.303) 51.148,29.303 ; 51.148,29.425 ccw(c51.803,29.425) 51.34,28.962 ccw(c51.742,29.364) 51.742,28.795 ccw(c51.742,28.226) XT701.1@51.34,28.628
NetC705_1: C705.1 U701.13 | length 6
  Top Layer w0.254: C705.1@47.335,28.188 48.527,28.188 50.872,25.843 U701.13@50.872,25.324 ; C705.1@47.457,28.066 cw(c47.753,27.77) 47.753,28.188 cw(c47.753,28.606) C705.1@47.457,28.31 ; 50.774,25.941 cw(c50.532,25.699) U701.13@50.874,25.699
NetC708_2: C708.2 C709.2 L701.2 R708.2 | length 15.1
  Top Layer w0.254: C709.2@35.001,27.807 C708.2@36.073,27.807 ; C709.2@35.148,27.685 cw(c35.443,27.389) 35.443,27.807 cw(c35.443,28.225) C709.2@35.148,27.929 ; L701.2@35.586,25.705 cw(c34.533,24.653) R708.2@36.022,24.653 ; L701.2@35.591,26.662 ccw(c34.472,27.807) C708.2@36.073,27.807 ; L701.2@35.765,25.885 cw(c35.146,25.266) 36.022,25.266 ; L701.2@35.769,26.481 ccw(c35.062,27.203) 36.073,27.203 ; R708.2@35.899,24.653 ccw(c35.604,24.948) 36.022,24.948 ccw(c36.439,24.948) R708.2@36.144,24.653 ; C708.2@35.925,27.685 ccw(c35.63,27.389) 35.63,27.807 ccw(c35.63,28.225) C708.2@35.925,27.929 ; C708.2@35.95,27.685 cw(c35.655,27.389) 36.073,27.389 cw(c36.49,27.389) C708.2@36.195,27.685 ; 36.022,25.118 cw(c37.064,25.118) L701.2@36.349,25.876 ; 36.073,27.166 ccw(c37.047,27.166) L701.2@36.358,26.478 ; C708.2@36.073,27.779 ccw(c37.66,27.779) L701.2@36.538,26.657 ; L701.2@36.523,25.692 ccw(c37.618,24.53) R708.2@36.022,24.53 36.022,26.141 L701.2@36.062,26.181 36.073,26.192 C708.2@36.073,27.807
NetC709_1: C709.1 U703.1 | length 4.4
  Top Layer w0.254: C709.1@33.928,27.929 ccw(c33.633,28.225) 34.051,28.225 ccw(c34.468,28.225) C709.1@34.173,27.929 ; C709.1@34.051,27.807 34.051,28.594 34.635,29.178 U703.1@36.057,29.178 ; U703.1@35.22,29.053 ccw(c34.917,28.749) 34.917,29.178 ccw(c34.917,29.608) U703.1@35.22,29.304
NetC710_2: C710.2 U703.6 | length 3.6
  Top Layer w0.254: U703.6@36.057,35.528 37.444,35.528 C710.2@38.054,34.919 ; U703.6@36.894,35.403 cw(c37.198,35.099) 37.198,35.528 cw(c37.198,35.958) U703.6@36.894,35.654 ; 37.716,35.257 cw(c37.378,34.919) C710.2@37.856,34.919 ; C710.2@37.776,35.197 ccw(c38.029,35.449) C710.2@38.029,35.092
NetC711_2: C711.2 U703.7 | length 3.7
  Top Layer w0.254: U703.7@36.057,36.798 37.266,36.798 C711.2@38.054,36.011 ; U703.7@36.894,36.673 cw(c37.198,36.369) 37.198,36.798 cw(c37.198,37.228) U703.7@36.894,36.924 ; 37.716,36.349 cw(c37.378,36.011) C711.2@37.856,36.011 ; C711.2@37.776,36.289 ccw(c38.029,36.541) C711.2@38.029,36.184
NetC712_2: C712.2 U703.16 | length 3.5
  Top Layer w0.508: C712.2@28.27,28.442 28.768,28.442 29.504,29.178 U703.16@30.469,29.178 ; C712.2@28.295,28.488 ccw(c28.295,29.74) 29.18,28.855
NetC713_1: C713.1 R710.2 | length 2.5
  Top Layer w0.254: R710.2@40.217,35.041 ccw(c39.898,35.361) 40.35,35.361 ; C713.1@40.228,36.016 cw(c39.932,35.72) 40.35,35.72 cw(c40.768,35.72) C713.1@40.472,36.016 ; R710.2@40.35,34.929 C713.1@40.35,36.138 ; 40.35,35.312 ccw(c40.733,35.312) R710.2@40.462,35.041
  Top Layer w0.381: R710.2@40.34,34.919 R710.2@40.35,34.929
NetC713_2: C713.2 J701.1 | length 3.3
  Top Layer w0.229: J701.1@41.025,37.082 cw(c40.413,36.47) 41.279,36.47 ; C713.2@41.144,36.269 ccw(c40.818,36.596) 41.279,36.596 ; 41.279,36.524 cw(c42.069,36.524) J701.1@41.51,37.082 ; 41.279,36.577 ccw(c41.714,36.577) C713.2@41.406,36.269 ; J701.1@41.279,37.379 41.279,36.159 C713.2@41.3,36.138
NetC714_1: C714.1 U703.12 | length 4.4
  Top Layer w0.254: C714.1@28.412,32.353 28.554,32.353 29.111,32.911 29.111,33.356 29.453,33.698 29.453,34.004 29.707,34.258 U703.12@30.469,34.258 ; 29.453,33.621 cw(c29.938,33.621) U703.12@29.807,34.087 ; 29.453,33.956 cw(c29.843,33.956) U703.12@29.738,34.332
NetC714_2: C714.2 R712.2 R714.1 U703.11 | length 10.6
  Top Layer w0.254: R714.1@26.994,31.282 ccw(c26.699,31.577) 27.117,31.577 ccw(c27.534,31.577) R714.1@27.239,31.282 ; R712.2@26.994,32.196 cw(c26.699,31.901) 27.117,31.901 cw(c27.534,31.901) R712.2@27.239,32.196 ; R714.1@27.117,31.134 R712.2@27.117,32.343 27.31,32.343 28.27,33.303 C714.2@28.412,33.303 28.996,33.888 28.996,34.542 29.382,34.928 29.382,35.325 29.585,35.528 U703.11@30.469,35.528 ; R712.2@27.117,32.541 ccw(c27.117,33.486) 27.784,32.818 ; C714.2@28.412,33.501 ccw(c28.412,33.979) 28.75,33.641 ; C714.2@28.585,33.328 cw(c28.942,33.328) C714.2@28.69,33.581 ; 29.382,34.82 cw(c29.935,34.82) U703.11@29.801,35.356 ; 29.382,35.145 cw(c29.854,35.145) U703.11@29.74,35.602
NetC715_1: C715.1 R711.2 | length 2.4
  Top Layer w0.254: R711.2@27.213,34.584 ccw(c26.917,34.879) 27.335,34.879 ccw(c27.753,34.879) R711.2@27.457,34.584 ; C715.1@27.222,35.432 cw(c26.951,35.16) 27.335,35.16 ; C715.1@27.32,35.554 27.335,35.539 R711.2@27.335,34.462 ; 27.335,35.113 cw(c27.786,35.113) C715.1@27.467,35.432 ; C715.1@27.462,35.401 C715.1@27.472,35.412
NetC715_2: C715.2 C717.1 R713.1 | length 4.5
  Top Layer w0.254: R713.1@27.593,37.707 cw(c27.298,37.412) 27.716,37.412 cw(c28.133,37.412) R713.1@27.838,37.707 ; R713.1@27.716,37.829 27.716,37.342 28.27,36.788 C717.1@28.27,36.646 C715.2@28.27,35.554 ; C715.2@28.147,35.676 ccw(c27.852,35.972) 28.27,35.972 ccw(c28.687,35.972) C715.2@28.392,35.676 ; C717.1@28.147,36.524 cw(c27.852,36.228) 28.27,36.228 cw(c28.687,36.228) C717.1@28.392,36.524
NetC718_2: C718.2 C719.2 D703.K E701.1 R724.2 R725.2 | length 47
  Top Layer w0.508: R725.2@39.517,5.801 ccw(c38.926,6.392) 39.762,6.392 ccw(c40.597,6.392) R725.2@40.006,5.801 ; C718.2@39.517,7.115 cw(c38.926,6.525) 39.762,6.525 cw(c40.597,6.525) C718.2@40.006,7.115 ; R725.2@39.736,5.455 39.762,5.48 39.762,7.284 C719.2@41.696,7.284 ; C718.2@40.031,7.115 cw(c40.438,6.709) 40.438,7.284 ; C718.2@40.031,7.605 ccw(c40.806,8.379) 40.806,7.284 ; 40.852,7.284 cw(c40.852,6.435) C719.2@41.452,7.035 ; 40.87,7.284 ccw(c40.87,8.106) C719.2@41.452,7.525 ; C719.2@41.696,6.934 cw(c41.696,5.986) 42.366,6.656 ; C719.2@41.696,7.305 41.718,7.305 44.004,5.019 46.186,5.019 D703.K@48.036,3.169 ; C719.2@42.042,7.28 ccw(c42.765,7.28) C719.2@42.254,6.769 ; 46.367,4.838 ccw(c48.189,6.659) D703.K@48.189,4.083 ; 47.142,4.063 cw(c46.416,3.337) D703.K@47.443,3.337 ; D703.K@47.235,3.97 ccw(c48.189,4.924) D703.K@48.189,3.575 ; D703.K@48.189,3.321 49.433,2.077 R724.2@55.539,2.077 ; 53.834,2.077 ccw(c53.834,4.142) R724.2@55.295,2.682 ; R724.2@55.539,2.538 56.461,2.538 ; R724.2@55.784,2.732 ccw(c56.251,3.199) 56.251,2.538 ; R724.2@55.791,2.249 cw(c56.461,1.615) 56.461,2.538 ; E701.1@59.527,14.319 59.167,13.959 59.167,5.244 56.461,2.538
NetC719_1: C719.1 C720.2 D702.A D703.A T701.E | length 73
  Top Layer w0.381: D702.A@41.823,3.194 42.103,3.474 D702.A@42.103,3.524 ; D703.A@44.389,2.496 cw(c44.389,0.932) 45.494,2.038 ; D703.A@44.389,3.169 44.389,3.143 45.824,1.708 ; D703.A@44.816,3.276 ccw(c45.966,3.196) D703.A@45.151,2.381 ; D703.A@45.196,3.249 ccw(c47.073,3.12) 45.743,1.789
  Top Layer w0.508: D702.A@41.296,3.839 ccw(c40.451,4.684) 41.645,4.684 ; C719.1@41.452,5.185 cw(c40.984,4.717) 41.645,4.717 ; 41.645,4.472 cw(c42.654,4.472) C719.1@41.941,5.185 ; D702.A@41.823,3.296 41.645,3.474 41.645,5.455 ccw(c43.847,5.455) D702.A@42.335,3.854 ; D702.A@41.823,3.524 42.103,3.524 D703.A@43.881,3.524 ; D702.A@42.136,3.524 cw(c42.136,1.084) D703.A@43.861,2.81 ; D702.A@42.351,3.839 ccw(c43.111,4.6) 43.111,3.524 ; D702.A@42.394,2.832 cw(c43.881,1.584) D703.A@43.881,3.524 ; 43.04,3.524 ccw(c43.04,4.686) D703.A@43.861,3.865 ; 43.362,3.524 cw(c43.362,2.311) D703.A@44.22,3.169 ; D703.A@44.389,3.321 46.344,1.365 51.983,1.365 58.435,1.365 v5(58.765,1.696) ; D703.A@44.627,3.305 ccw(c45.898,3.305) D703.A@44.999,2.406 ; 45.169,2.236 ccw(c44.389,1.456) 44.389,2.559 cw(c44.389,0.72) 45.689,2.02 ; 45.651,2.059 cw(c46.897,3.305) 45.135,3.305 ccw(c47.633,3.305) 45.866,1.539 ; 46.04,1.365 D703.A@43.881,3.524 ; 57.508,1.365 ccw(c57.508,2.953) v5@58.63,1.83 ; C720.2@60.718,7.615 cw(c60.35,6.49) v5@61.534,6.49 ; C720.2@60.801,7.922 C720.2@60.801,7.944 ; C720.2@60.826,7.598 cw(c60.826,6.823) C720.2@61.374,7.371 ; C720.2@60.826,8.29 ccw(c60.826,9.013) C720.2@61.337,8.502 ; C720.2@60.877,8.098 cw(c60.58,7.191) 61.534,7.191 ; v5@61.374,6.783 ccw(c60.987,7.17) 61.534,7.17 ; 61.435,7.311 cw(c62.068,7.944) 61.172,7.944 cw(c62.12,7.944) 61.45,8.614 ; v5(61.508,6.649) 61.534,6.674 61.534,7.212 C720.2@60.801,7.944 ; T701.E@62.341,10.934 ccw(c61.775,11.5) T701.E@62.575,11.5 ; T701.E@62.374,10.968 cw(c62.893,10.449) T701.E@62.893,11.183 ; T701.E@62.956,11.602 62.956,11.55 61.757,10.351 61.757,8.921 60.801,7.966 C720.2@60.801,7.944
  Bottom Layer w0.508: v5@58.765,1.505 cw(c58.765,1.045) 59.09,1.37 cw(c59.415,1.696) v5@58.956,1.696 ; v5(58.765,1.696) 59.603,0.857 61.889,0.857 63.235,2.204 63.235,5.963 62.55,6.649 v5(61.508,6.649) ; v5@61.643,6.514 cw(c61.968,6.189) 61.968,6.649 cw(c61.968,7.109) v5@61.643,6.783